# Allegro board EGR314.brd
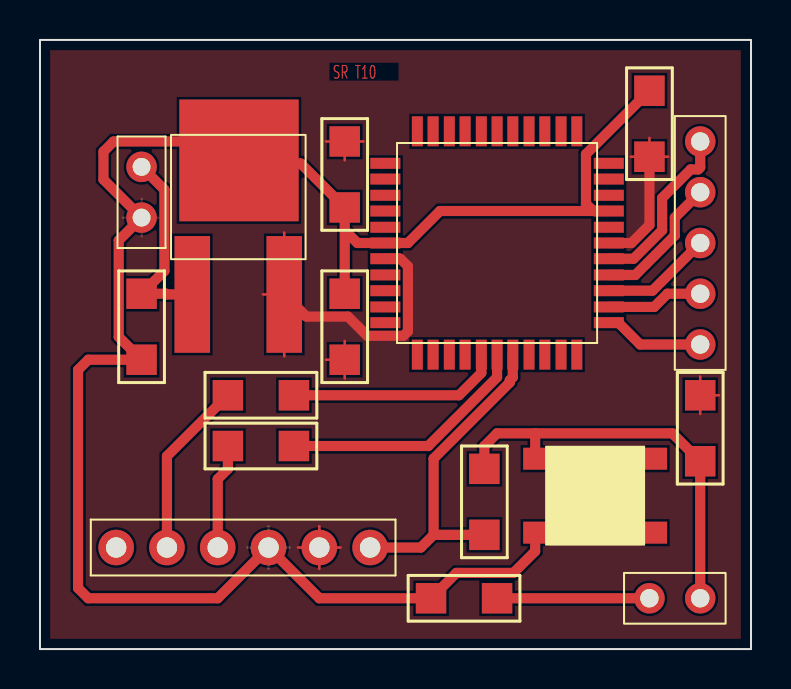
[diagram p0: board, top side]
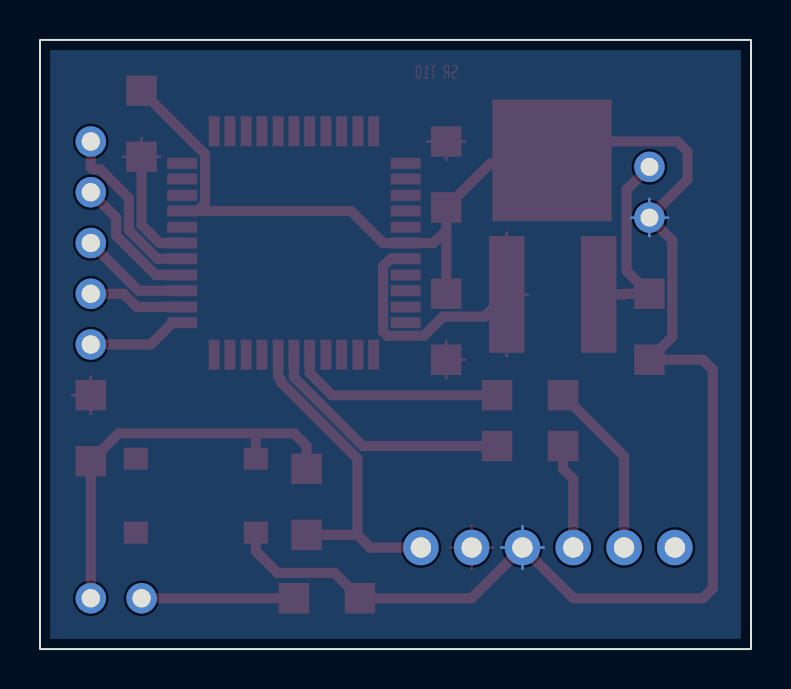
[diagram p1: board, bottom side, seen from below]

Outline 35.56 x 30.48 mm; copper layers: TOP, BOTTOM. Coordinates in mm from the lower left corner of the outline.
Outline path: rectangle 0,0 35.56,30.48

## Placement (name value [footprint] x y rotation side)
BT1  7.2V  [HEADER2]  5.08 22.86 0 top
C1  0.1uF, 15V  [SMC1206]  5.08 17.78 270 top
C2  0.1uF, 15V  [SMC1206]  15.24 25.4 270 top
C3  0.1uF, 15V  [SMC1206]  30.48 27.94 270 top
C4  0.1 uF, 15V  [SMC1206]  22.86 2.54 180 top
C5  0.1uF, 15V  [SMC1206]  15.24 17.78 270 top
J1  JUMPER  [JUMPER2]  30.48 2.54 0 top
J2  CON6  [HEADER6]  10.16 5.08 270 top
J3  HEADER 5  [JUMPER5]  33.02 15.24 90 top
R1  10 kohm, 1/4W  [SMR1206]  33.02 12.7 270 top
R2  220 ohm, 1/4W  [SMR1206]  22.22 5.72 90 top
R3  22 ohm, 1/4W  [SMR1206]  12.7 12.7 180 top
R4  22 ohm, 1/4W  [SMR1206]  12.7 10.16 180 top
SW1  SW PUSHBUTTON-SPST-2  [SMDSWITCH]  24.76 9.53 0 top
U1  LD29150DT33R  [TO252AA]  7.62 17.78 0 top
U2  PIC18F47K40-I/PT  [TQFPPIC18F47K40]  22.86 20.32 0 top

## Library data of the parts
BT1 = BATTERY
C1-C5 = CAP NP
J1 = JUMPER: User Part Number: ***
J2 = CON6
J3 = HEADER 5: User Part Number: ***
R1-R4 = R
SW1 = SW PUSHBUTTON-SPST-2
U1 = LD29150DT33R
U2 = PIC18F47K40-I/PT_2

## Footprints (pads in the part's own frame, mm; a bottom-side part is the same pattern mirrored in y, then rotated)
HEADER2
  round 1.524 hole 0.889: 1(0,1.27) 2(0,-1.27)
HEADER6
  round 1.778 hole 1.016: 1(0,6.35) 2(0,3.81) 3(0,1.27) 4(0,-1.27) 5(0,-3.81) 6(0,-6.35)
JUMPER2
  round 1.524 hole 0.914: 1(0,0) 2(2.54,0)
JUMPER5
  round 1.524 hole 0.914: 1(0,0) 2(2.54,0) 3(5.08,0) 4(7.62,0) 5(10.16,0)
SMC1206
  rect 1.524x1.524 smd: 1(0,0) 2(3.302,0)
SMDSWITCH
  rect 1.2x1.1 smd: 1(0,0) 2(6,0) 3(0,-3.7) 4(6,-3.7)
SMR1206
  rect 1.524x1.524 smd: 1(0,0) 2(3.302,0)
TO252AA
  rect 1.778x5.842 smd: 1(-0.004,-0.034) 3(4.596,-0.034)
  rect 5.969x6.096 smd: 2(2.332,6.673)
TQFPPIC18F47K40
  rect 1.5x0.55 smd: 1(-5.588,3.988) 2(-5.588,3.2) 3(-5.588,2.388) 4(-5.588,1.6) 5(-5.588,0.787) 6(-5.588,0) 7(-5.588,-0.787) 8(-5.588,-1.6) 9(-5.588,-2.388) 10(-5.588,-3.2) 11(-5.588,-3.988) 23(5.588,-3.988) 24(5.588,-3.2) 25(5.588,-2.388) 26(5.588,-1.6) 27(5.588,-0.787) 28(5.588,0) 29(5.588,0.787) 30(5.588,1.6) 31(5.588,2.388) 32(5.588,3.2) 33(5.588,3.988)
  rect 0.55x1.5 smd: 12(-3.988,-5.588) 13(-3.2,-5.588) 14(-2.388,-5.588) 15(-1.6,-5.588) 16(-0.787,-5.588) 17(0,-5.588) 18(0.787,-5.588) 19(1.6,-5.588) 20(2.388,-5.588) 21(3.2,-5.588) 22(3.988,-5.588) 34(3.988,5.588) 35(3.2,5.588) 36(2.388,5.588) 37(1.6,5.588) 38(0.787,5.588) 39(0,5.588) 40(-0.787,5.588) 41(-1.6,5.588) 42(-2.388,5.588) 43(-3.2,5.588) 44(-3.988,5.588)

## Nets
3.3V: C2.1 C3.2 C5.2 J2.2 R1.1 U1.3(OUT) U2.7(VDD_0) U2.28(VDD_1)
GND: BT1.2(-) C1.2 C2.2 C3.1 C4.2 C5.1 J2.3 SW1.3 U1.2(GND) U2.6(VSS_0) U2.30(VSS_1)
ICSPCLK: R3.1 U2.16(ICSPCLK/RB6)
ICSPDAT: R4.1 U2.17(ICSPDAT/RB7)
MCLR/VPP: J2.1 R2.1 U2.18(VPP/MCLR/RE3)
N103726: BT1.1(+) C1.1 U1.1(IN)
N112049: J2.4 R4.2
N112053: J2.5 R3.2
N112388: J1.2 R1.2 R2.2 SW1.1
N112486: C4.1 J1.1
N115043: J3.1 U2.23(RA4)
N115055: J3.2 U2.24(RA5)
N115065: J3.3 U2.25(RE0)
N115078: J3.4 U2.26(RE1)
N115090: J3.5 U2.27(RE2)

Pads without a net: J2 6; SW1 2 4; U2 1 2 3 4 5 8 9 10 11 12 13 14 15 19 20 21 22 29 31 32 33 34 35 36 37 38 39 40 41 42 43 44

## Routing (per net, layer and track width the routed paths; a pad name or vN(x,y) marks a point on that pad's centre or on a via; arc(x,y) is an arc through that point)
3.3V: length 40.3
  TOP w0.127: 11.15,17.75 U1.3 ; U1.3 12.22,20.85 ; U1.3 12.22,14.65 ; 29.54,24.64 C3.2 ; C3.2 31.42,24.64 ; C3.2 30.48,25.58 ; R1.1 33.96,12.7 ; R1.1 33.02,13.64 ; R1.1 33.02,11.76 ; C5.2 15.24,15.42 ; C5.2 14.3,14.48 ; C5.2 15.24,13.54 ; 13.97,4.01 J2.2 ; J2.2 15.04,5.08 ; J2.2 12.9,5.08 ; J2.2 13.97,6.15 ; 14.3,25.4 C2.1 ; C2.1 16.18,25.4 ; C2.1 15.24,24.46
  TOP w0.508: U2.7 18.02,19.53 18.4,19.15 18.4,15.9 18.18,15.68 16.36,15.68 15.4,16.64 13.33,16.64 U1.3 ; U2.28 29.58,20.32 30.48,21.22 C3.2
GND: length 101.4
  TOP w0.508: SW1.3 24.76,4.89 23.68,3.81 20.83,3.81 C4.2 13.97,2.54 J2.3 8.89,2.54 2.41,2.54 1.91,3.05 1.91,13.97 2.41,14.48 C1.2 3.94,15.62 3.94,20.45 BT1.2 3.17,23.5 3.17,24.89 3.68,25.4 9.44,25.4 9.95,24.89 U1.2 10.1,24.3 13.04,24.3 C2.2 15.24,20.95 ; 27.67,21.92 20,21.92 18.4,20.32 U2.6 15.88,20.32 15.24,20.95 ; 27.67,21.92 27.31,22.29 27.31,24.76 C3.1 ; 27.67,21.92 U2.30 ; 15.24,20.95 C5.1
  BOTTOM w0.127: 11.43,4.01 J2.3 ; J2.3 12.5,5.08 ; J2.3 10.36,5.08 ; J2.3 11.43,6.15 ; 4.14,21.59 BT1.2 ; BT1.2 5.08,20.65 ; BT1.2 5.08,22.53 ; BT1.2 6.02,21.59
ICSPCLK: length 10.7
  TOP w0.508: U2.16 22.07,13.82 20.95,12.7 R3.1
ICSPDAT: length 12.7
  TOP w0.508: U2.17 22.86,13.6 19.42,10.16 R4.1
MCLR/VPP: length 16.6
  TOP w0.508: R2.1 19.69,5.72 ; 19.69,5.72 19.05,5.08 J2.1 ; 19.69,5.72 19.69,9.53 23.5,13.34 23.5,13.45 23.65,13.6 U2.18
N103726: length 9.8
  TOP w0.508: BT1.1 6.22,22.99 6.22,18.92 C1.1 6.31,17.78 6.35,17.75 U1.1
N112049: length 5.3
  TOP w0.508: R4.2 9.4,9.02 8.89,8.51 J2.4
N112053: length 8.9
  TOP w0.508: R3.2 6.35,9.65 J2.5
N112388: length 20.9
  TOP w0.508: J1.2 R1.2 31.62,10.79 24.76,10.79 ; SW1.1 24.76,10.79 ; 24.76,10.79 22.86,10.79 22.22,10.16 R2.2
N112486: length 7.6
  TOP w0.508: C4.1 J1.1
N115043: length 5
  TOP w0.508: J3.1 30.02,15.24 28.92,16.33 U2.23
N115055: length 4.8
  TOP w0.508: U2.24 30.72,17.12 31.38,17.78 J3.2
N115065: length 5.6
  TOP w0.508: J3.3 30.63,17.93 U2.25
N115078: length 6.8
  TOP w0.508: J3.4 31.75,21.59 31.75,20.69 29.78,18.72 U2.26
N115090: length 8.7
  TOP w0.508: U2.27 29.69,19.53 31.11,20.96 31.11,22.57 32.55,24 32.92,24 33.02,24.1 J3.5

## Copper pours and planes (outline as drawn; the poured copper is in the pictures)
3.3V on TOP: 0.51,0.51 0.51,29.97 35.05,29.97 35.05,0.51
GND on BOTTOM: 0.51,0.51 0.51,29.97 35.05,29.97 35.05,0.51

## Text on the board
TOP: SR T10
